# Altium PCB Oscilador267MHz.PcbDoc
Units mm, origin at the board's own origin, x right, y up, seen from the top; angles counter-clockwise.
Board outline 30 x 20 mm, 2 copper layers (Top Layer, Bottom Layer), stack 1.571 mm thick; 14 components, 7 nets, 29 pads, 1 vias.
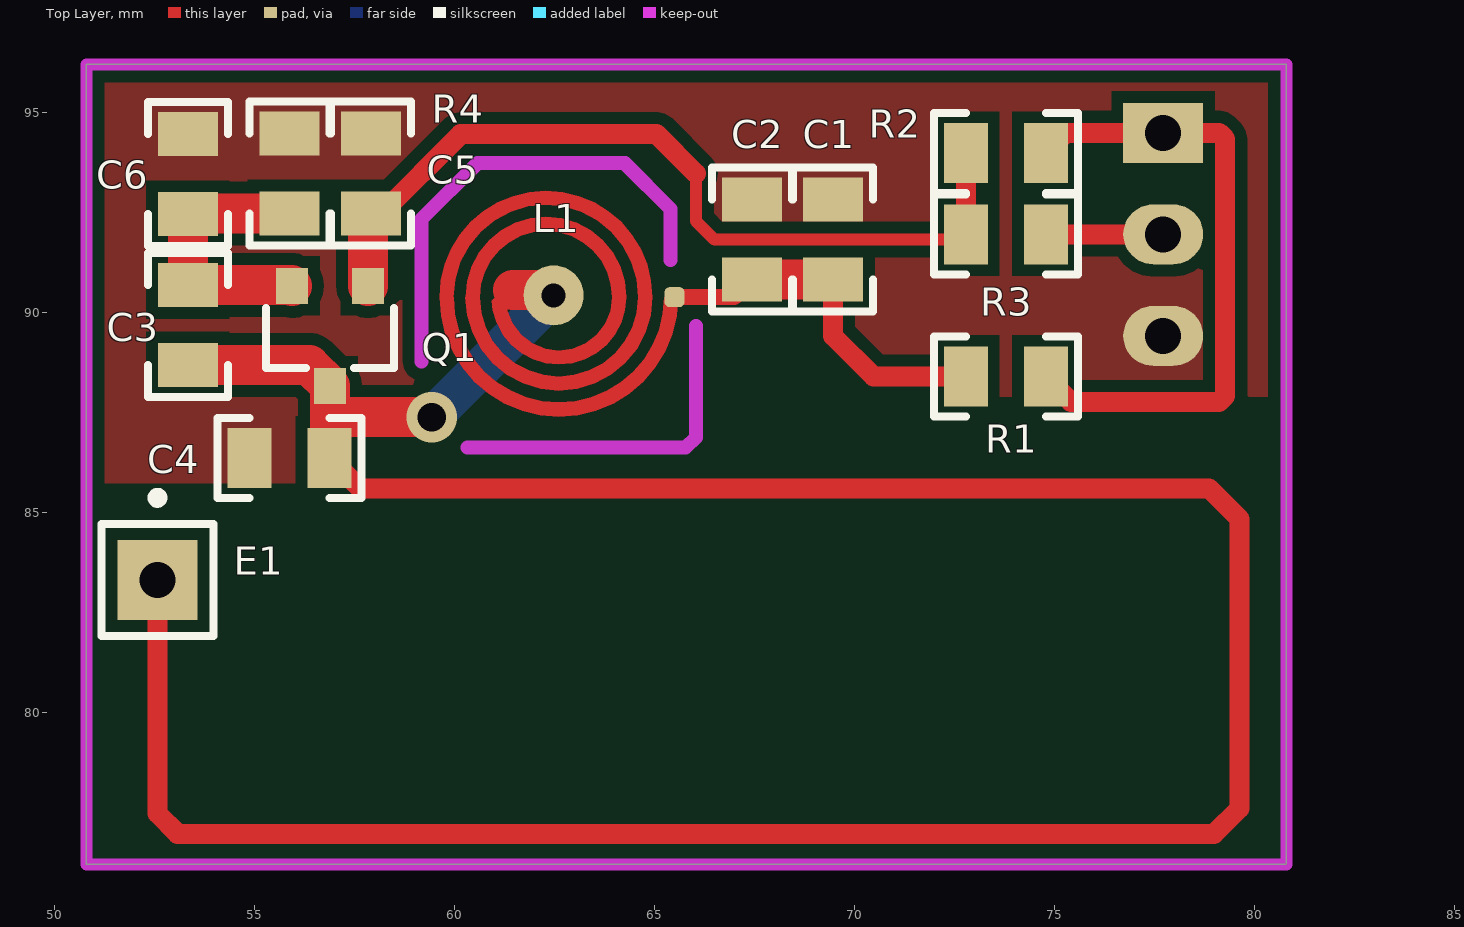
[diagram p0: Top Layer view]
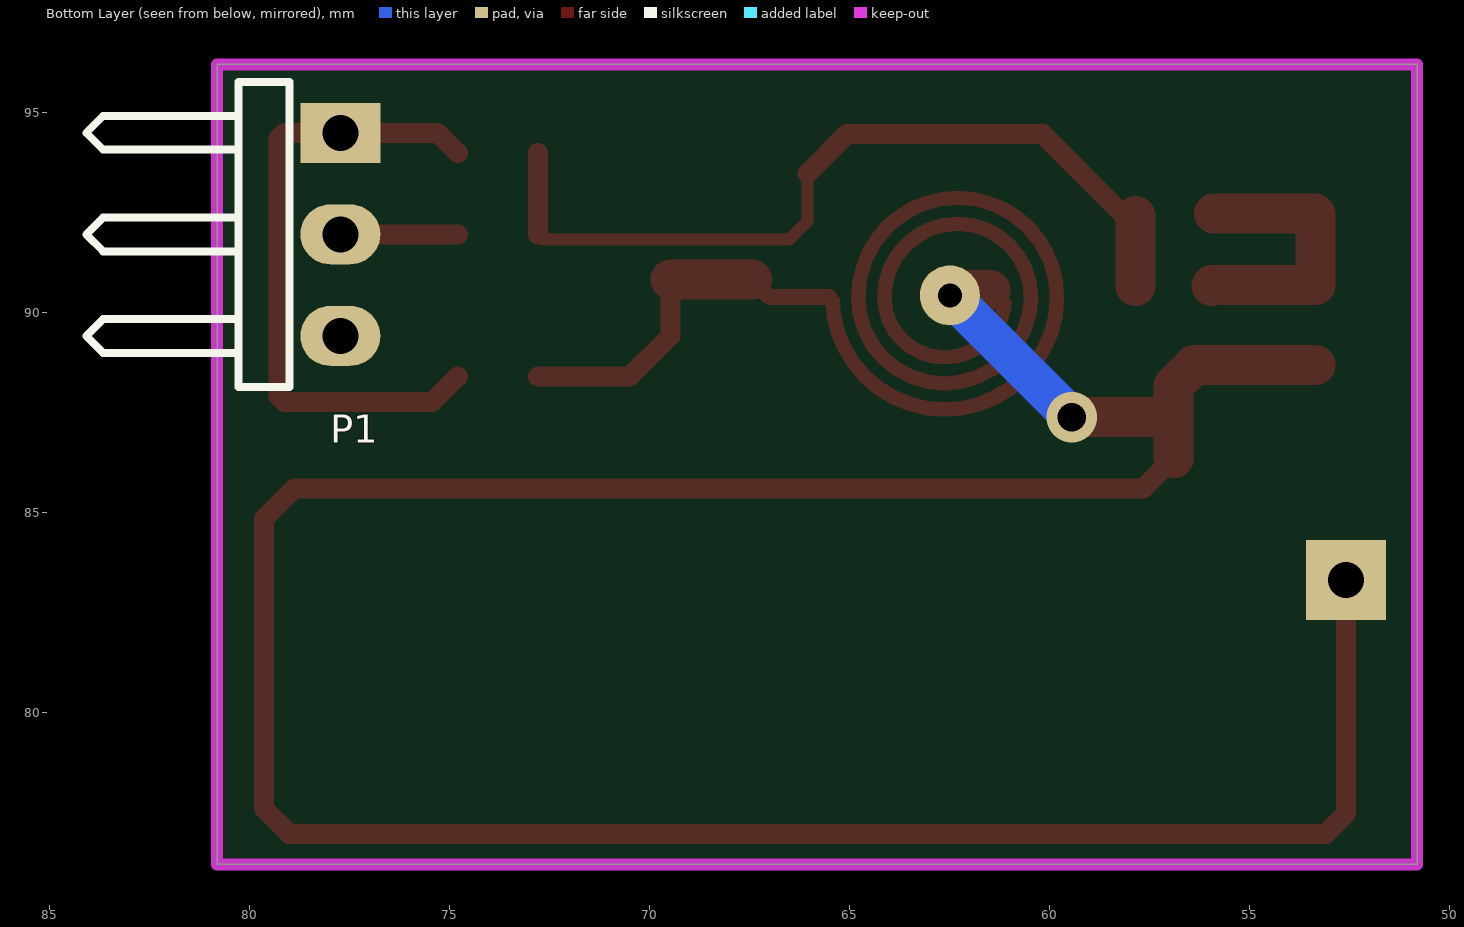
[diagram p1: Bottom Layer view, seen from below]
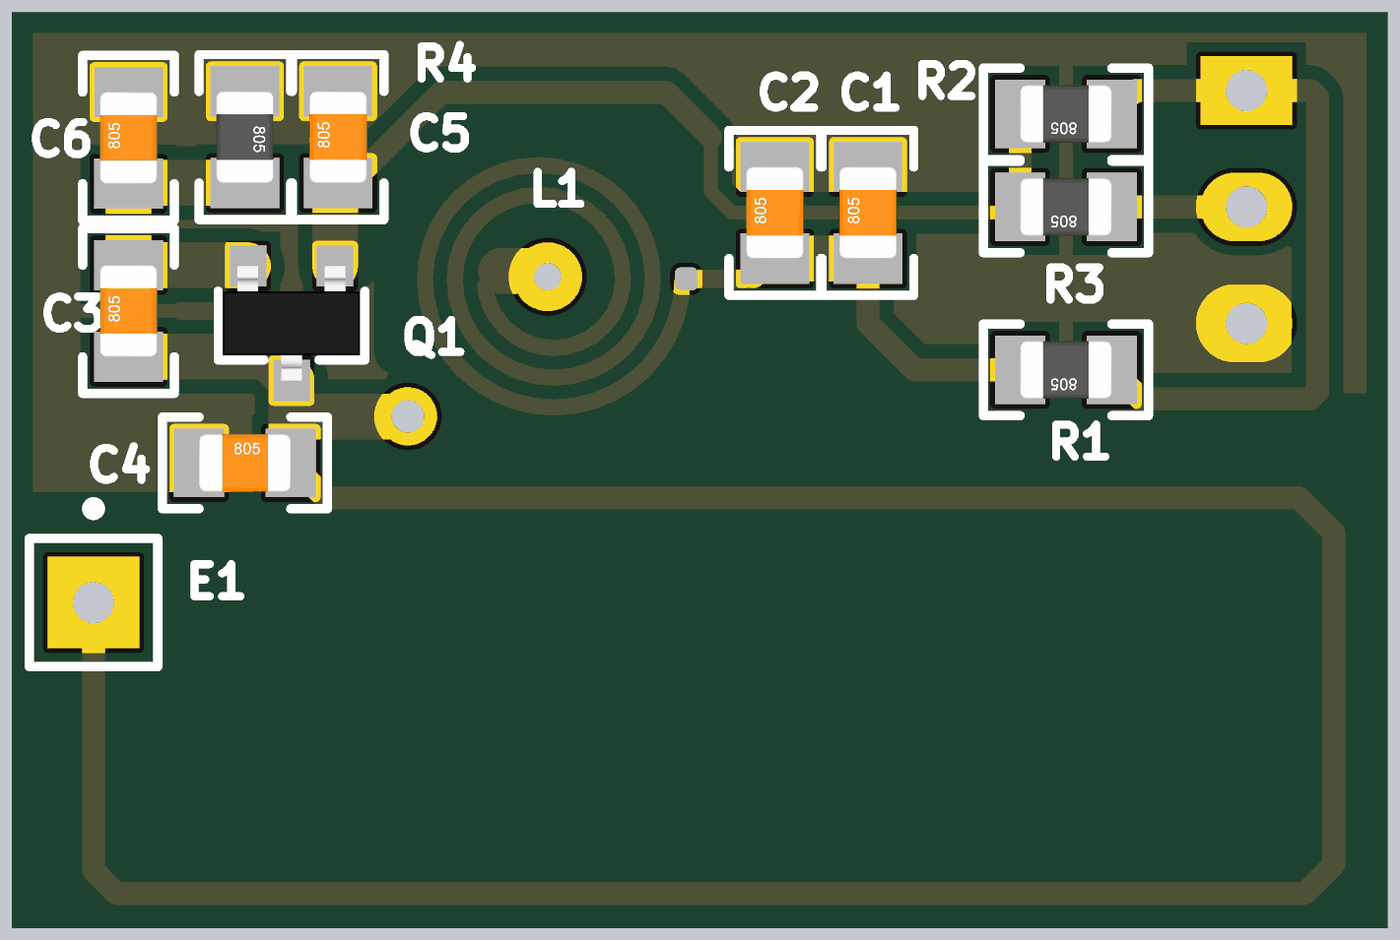
[diagram p2: 3D render of the assembled board from above, using the file's embedded part models]

## Layer stack, top to bottom
Top Layer: signal copper 0.0356
Dielectric: core 1.5, FR-4, Dk 4.8
Bottom Layer: signal copper 0.0356

## Board outline
50.8,76.2 80.8,76.2 80.8,96.2 50.8,96.2

## Design rules (kind name [scope] priority, off if disabled: settings)
Clearance [All] p1: gap=0.3
PolygonConnect [All] p1: connectstyle=Direct reliefconductorwidth=0.254 reliefentries=4 polygonreliefangle="90 Angle"
RoomDefinition Oscilador267MHz [InComponentClass('Oscilador267MHz')] p1: confinementstyle=ConfineIn formatcopy=TRUE lockcomponents=TRUE outline 50.419,75.819 84.455,75.819 84.455,96.774 50.419,96.774
RoutingVias [All] p1: holewidth=0.6 width=1 viastyle="Through Hole" minholewidth=0.711 minwidth=1.27 maxholewidth=0.711 maxwidth=1.27
SilkscreenOverComponentPads [All] p1: minsilkscreentomaskgap=0
SolderMaskExpansion [All] p1: expansion=0.102
TestPointUsage [All] p1: valid=0 allowmultiple=FALSE
Testpoint [All] p1: side=15 testpointundercomponent=TRUE minsize=1.016 maxsize=2.54 preferedsize=1.524 minholesize=0 maxholesize=1.016 preferedholesize=0.813 testpointgrid=0.025 style=1023 order=0123456789
Width [All] p1: maxlimit=3 minlimit=0.3 preferedwidth=1
23 further rules are at their usual default settings.

## Components (designator, comment, footprint, x,y, rotation, side; value= is the part's Value field where it differs from the comment)
C1 "Capacitor" 0805_CAP 69.469,91.821 r270 top
C2 "Capacitor" 0805_CAP 67.437,91.821 r270 top
C3 "Capacitor" 0805_CAP 53.34,89.678 r270 top
C4 "Capacitor" 0805_CAP 55.88,86.36 r0 top
C5 "Capacitor" 0805_CAP 57.912,93.472 r270 top
C6 "Capacitor" 0805_CAP 53.34,93.456 r270 top
E1 "Antenna" PIN1 52.578,83.312 r0 top
L1 "MicrostripInd" MSIND_33nH 62.484,90.424 r270 top
P1 "Header 3H" HDR1X3H 77.724,94.488 r270 bottom
Q1 "BFS17" SOT23 56.896,89.408 r180 top
R1 "Resistor" 0805_RES 73.787,88.392 r180 top
R2 "Resistor" 0805_RES 73.787,93.98 r180 top
R3 "Resistor" 0805_RES 73.787,91.948 r180 top
R4 "Resistor" 0805_RES 55.88,93.472 r90 top

## Footprints (in the part's own frame and the unit in brackets; to place one, negate y for a bottom-side part, rotate by r counter-clockwise, add the part's x,y. Pads: shape width x height; smd on the part's side, far side on the other; paste and mask are expansions set on the pad)
0805_CAP [mm]
  rect 1.1x1.5 smd: 1(-1,0) 2(1,0)
  silkscreen extent -1.8,-1 1.8,1, body extent -1,-0.62 1,0.63, height 0.78
0805_RES [mm]
  rect 1.1x1.5 smd: 1(-1,0) 2(1,0)
  silkscreen extent -1.8,-1 1.8,1, body extent -1,-0.62 1,0.63, height 0.78
HDR1X3H [mm] "Connector; Header; 3 Position; Right Angle"
  rect 1.5x2 hole 0.9: 1(0,0)
  oval 1.5x2 hole 0.9: 2(2.54,0) 3(5.08,0)
  silkscreen extent -1.27,-6.35 6.35,-1.27
MSIND_33nH [mm]
  rrect50% 0.5x0.5 smd: 1(0.045,3.022)
  round 1.5 hole 0.6: 2(0,0)
  Top Layer region: 189 vertices and 0 holes, not listed, extent -2.613,-2.853 3.03,3.108
  Top Layer lines w1: -0.127,-1.016 -0.127,0
PIN1 [mm] "Generic Antenna; 1 Lead"
  rect 2x2 hole 0.9: 1(0,0)
  silkscreen extent -1.4,-1.4 1.4,2.17
SOT23 [mm]
  rect 0.8x0.9 smd: 1(-0.95,-1.25) 2(0.95,-1.25) 3(0,1.25)
  silkscreen extent -1.6,-0.7 1.6,0.8, body extent -1.5,-1.25 1.5,1.25, height 1.05

## Part data
C1 C2 C3 C4 C5 C6: library part Cap
E1: "Generic Antenna"
L1: library part MSIND, "Bobina microstrip calculadas con ADS"
P1: "Header, 3-Pin, Right Angle"
Q1: "NPN 1 GHz Wideband Transistor"
R1 R2 R3 R4: library part Res

## Via types
v1: diameter 1.27, hole 0.711, Top Layer to Bottom Layer, 1 vias

## Nets (pads, with @x,y where several pads share a name; then routed paths per layer and width w, separated by ;. In a path a pad name is that pad's centre, name@x,y a point inside that pad or via, vN(x,y) a via of type N, cw(c..) or ccw(c..) an arc to the next point about the centre after c; other vN are vias at no path point)
GND: C1.1 C2.1 C4.1 C5.1 C6.1 P1.3 R4.2
NetC1_2: C1.2 C2.2 L1.1 R1.2 | length 9.3
  Top Layer w0.4: L1.1 66.995,90.379 C2.2
  Top Layer w0.5: C1.2 69.469,89.408 70.485,88.392 R1.2
  Top Layer w1: C2.2 C1.2
NetC3_1: C3.1 C6.2 Q1.2 R4.1 | length 6.9
  Top Layer w1: R4.1 53.356,92.472 C6.2 C3.1 55.926,90.678 Q1.2
NetC3_2: C3.2 C4.2 E1.1 L1.2 Q1.3 | length 76.4
  Top Layer w0.5: E1.1 52.578,77.47 53.086,76.962 78.994,76.962 79.629,77.597 79.629,84.836 78.867,85.598 57.642,85.598 C4.2
  Top Layer w1: C3.2 56.376,88.678 Q1.3 56.896,87.376 ; C4.2 56.896,86.376 56.896,87.376 ; v1(59.436,87.376) 56.896,87.376
  Bottom Layer w1: v1(59.436,87.376) L1.2
NetC5_2: C5.2 Q1.1 R2.2 R3.2 | length 21.6
  Top Layer w0.3: 66.04,93.472 66.04,92.282 66.501,91.821 72.66,91.821 R3.2
  Top Layer w0.5: 66.04,93.472 65.061,94.451 60.161,94.451 C5.2@58.182,92.472 ; R3.2 R2.2 ; C5.2@58.182,92.472 C5.2 C5.2@58.182,92.472
  Top Layer w1: Q1.1 C5.2@57.846,92.406
NetP1_2: P1.2 R3.1 | length 2.9
  Top Layer w0.5: R3.1 P1.2
VCC: P1.1 R1.1 R2.1 | length 16
  Top Layer w0.5: R1.1 75.422,87.757 79.121,87.757 79.274,87.91 79.274,94.335 79.121,94.488 P1.1 75.295,94.488 R2.1

## Polygon pours and split planes (outlines as drawn)
GND on Top Layer "Top Layer-No Net" (solid, remove dead copper): 80.8,96.2 50.8,96.2 50.8,85.598 50.927,85.725 55.626,85.725 57.277,85.725 58.928,87.376 59.436,87.884 70.866,87.884 80.8,87.884

## Keep-outs
Top Layer:
  lines w0.35: 59.182,88.773 59.182,92.329 60.579,93.726 64.262,93.726 65.405,92.583 65.405,91.313 ; 60.325,86.614 65.786,86.614 66.04,86.868 66.04,89.662
Keep-Out Layer:
  the board outline again, w0.3

## Dimensions
50.8,76.2 to 50.8,96.2 on Mechanical 1
50.8,76.2 to 80.8,76.2 on Mechanical 1